# EAGLE board Shiny Stantia (EAGLE 7.6.0)

Size 56.82 x 53.33 mm. Coordinates in mm from the lower left corner, seen from the top.
Outline: 0,0 56.82,0 56.82,53.33 0,53.33 0,0
Copper layers (1*16): Top 0.035mm / dielectric 1.5mm / Bottom 0.035mm
Design rules "default": minimum track width 10mil, minimum drill 24mil, track to track 8mil, track to pad 8mil, pad to pad 8mil, via to via 8mil, smd to smd 8mil, copper to edge 40mil, drill to drill 8mil, minimum pad ring 10mil, minimum via ring 8mil, stop-mask expansion 4mil, vias tented up to drill 0mil, thermal gap 10mil

## Footprints (pad centres in the part's own frame; a part is rotated, then mirrored left to right if it is on the bottom)
DC-POWER = drill 0.889 pad 2.54 octagon: + 0,2.54; - 0,-2.54
LED5MM = drill 0.813 octagon: A -1.27,0; K 1.27,0
DIP04YL = drill 0.813 long: 1 -3.81,-3.81; 2 -1.27,-3.81; 3 1.27,-3.81; 4 3.81,-3.81; 5 3.81,3.81; 6 1.27,3.81; 7 -1.27,3.81; 8 -3.81,3.81
DIL14 = drill 0.813 long: 1 -7.62,-3.81; 2 -5.08,-3.81; 3 -2.54,-3.81; 4 0,-3.81; 5 2.54,-3.81; 6 5.08,-3.81; 7 7.62,-3.81; 8 7.62,3.81; 9 5.08,3.81; 10 2.54,3.81; 11 0,3.81; 12 -2.54,3.81; 13 -5.08,3.81; 14 -7.62,3.81

## Placement (x,y rotation side)
BAT1  [DC-POWER]  5,22.78 0 top
D1  [LED5MM]  5,327.58 0 top  (outside the outline)
D2  [LED5MM]  5,340.28 0 top  (outside the outline)
SW1  [DIP04YL]  5,10.08 0 top
SW3  [DIP04YL]  5,251.38 0 top  (outside the outline)
SW4  [DIP04YL]  5,264.08 0 top  (outside the outline)
U1  [DIL14]  5,35.48 0 top
U2  [DIL14]  5,48.18 0 top
U3  [DIL14]  5,60.88 0 top  (outside the outline)
U4  [DIL14]  5,73.58 0 top  (outside the outline)
U5  [DIL14]  5,86.28 0 top  (outside the outline)
U6  [DIL14]  5,98.98 0 top  (outside the outline)
U7  [DIL14]  5,111.68 0 top  (outside the outline)
U8  [DIL14]  5,124.38 0 top  (outside the outline)
U9  [DIL14]  5,137.08 0 top  (outside the outline)
U10  [DIL14]  5,149.78 0 top  (outside the outline)
U11  [DIL14]  5,162.48 0 top  (outside the outline)
U12  [DIL14]  5,175.18 0 top  (outside the outline)
U13  [DIL14]  5,187.88 0 top  (outside the outline)
U14  [DIL14]  5,200.58 0 top  (outside the outline)
U15  [DIL14]  5,213.28 0 top  (outside the outline)
U16  [DIL14]  5,225.98 0 top  (outside the outline)
U17  [DIL14]  5,238.68 0 top  (outside the outline)
U18  [DIL14]  5,276.78 0 top  (outside the outline)
U19  [DIL14]  5,289.48 0 top  (outside the outline)
U20  [DIL14]  5,302.18 0 top  (outside the outline)
U21  [DIL14]  5,314.88 0 top  (outside the outline)

## Library data of the parts
BAT1 D1 D2 SW1 SW3 SW4 U1-U21 = AUTODESK_CIRCUITS_BREADBOARD

## Nets
N$1: U1.2 U2.3
N$2: U1.8
N$3: U1.6 U2.2
N$4: U1.9
N$5: U1.10
N$6: U1.11
N$7: U3.5
N$8: U3.4
N$9: U3.11
N$10: U3.6
N$11: U3.9
N$12: U3.3
N$13: U1.4 U3.1
N$14: U3.8
N$15: U3.10
N$16: U1.12 U2.13 U3.13
N$17: U4.8
N$18: U4.9
N$19: U4.10
N$20: U4.11
N$21: U4.2 U5.1 U5.9
N$22: U5.13
N$23: U4.6 U6.5 U6.13
N$24: U4.4 U6.4
N$25: U6.6 U7.1
N$26: U6.11 U6.12
N$27: U6.9
N$28: U7.5
N$29: U4.12 U5.5 U5.11 U7.2
N$30: U7.4
N$31: U7.6
N$32: U7.9 U8.6 U9.10
N$33: U7.3
N$34: U7.13
N$35: U8.8
N$36: U8.9
N$37: U8.4
N$38: U8.10
N$39: U8.11
N$40: U9.5
N$41: U8.2 U9.3 U9.11
N$42: U8.12 U9.9
N$43: U9.13
N$44: U10.8
N$45: U10.9
N$46: U10.10
N$47: U10.11
N$48: SW1.4 U1.13 U2.5 U4.13 U6.10 U7.10 U8.13 U9.2 U10.13 U11.5
N$49: SW1.2 U1.3 U2.1 U2.4 U2.10 U4.3 U5.3 U5.10 U6.2 U8.3 U9.1 U9.4 U10.3 U11.4 U11.11
N$50: U10.2 U11.1 U11.3
N$51: SW1.3 U1.5 U2.11 U3.2 U4.5 U5.2 U5.4 U8.5 U10.5 U11.10
N$52: U10.6 U11.13
N$53: U12.5
N$54: U10.4 U11.2 U12.2
N$55: U12.4
N$56: U12.11
N$57: U12.6
N$58: U12.9
N$59: U12.3
N$60: SW1.1 U1.1 U2.9 U4.1 U6.1 U6.3 U7.11 U8.1 U10.1 U12.1
N$61: U12.8
N$62: U12.10
N$63: U10.12 U11.9 U12.13
N$64: U2.12 U13.1
N$65: U2.8 U13.5
N$66: U3.12 U13.12
N$67: U2.6 U13.2
N$68: U13.6 U13.13
N$69: U13.8 U14.1
N$70: U5.6 U13.9
N$71: U14.3 U14.4
N$72: U6.8 U14.5
N$73: U7.12 U14.12
N$74: U5.8 U14.2
N$75: U14.6 U14.13
N$76: U14.8
N$77: U14.9
N$78: U14.10
N$79: U5.12 U13.10
N$80: U15.3 U15.4
N$81: U9.8 U15.5
N$82: U7.8 U15.12
N$83: U9.6 U15.2
N$84: U15.6 U15.13
N$85: U15.8
N$86: U15.9
N$87: U15.10
N$88: U16.1
N$89: U16.3
N$90: U16.5
N$91: U16.11
N$92: U16.12
N$93: U16.4
N$94: U16.13
N$95: U16.2
N$96: U16.6
N$97: U16.8
N$98: U16.9
N$99: U16.10
N$100: U17.3 U17.4
N$101: U11.8 U17.5
N$102: U17.11
N$103: U17.12
N$104: U17.13
N$105: U11.6 U17.2
N$106: U17.6 U17.9
N$107: U12.12 U17.10
N$108: U11.12 U17.1
N$109: SW3.3 U18.12
N$110: SW3.4 U18.9
N$111: SW3.1 U18.2
N$112: SW3.2 U18.5
N$113: SW4.3
N$114: SW4.4
N$115: SW4.5
N$116: SW4.1 U18.1 U18.4 U18.10 U18.13 U21.12
N$117: SW4.2
N$118: SW4.6
N$119: SW4.7
N$120: U18.3 U19.1
N$121: U18.11 U19.13
N$122: U19.6 U20.3
N$123: U18.8 U19.10
N$124: U19.8 U20.13
N$125: U15.11 U19.12
N$126: U17.8 U19.9
N$127: U18.6 U19.4
N$128: U13.11 U19.2
N$129: U14.11 U19.5
N$130: U19.3 U20.1
N$131: U13.3 U13.4
N$132: U9.12 U15.1
N$133: U20.8 U21.13
N$134: U20.12 U21.5
N$135: U20.2 U21.1
N$136: U19.11 U20.5
N$137: U20.6 U21.4
N$138: U20.4 U21.2
N$139: U20.10
N$140: U20.11
N$141: U20.14
N$142: D2.K U21.8
N$143: U21.10
N$144: U21.11
N$145: U21.3
N$146: D1.K U20.9 U21.6
N$147: U21.9
N$148: BAT1.+ SW1.5 SW1.6 SW1.7 SW1.8 SW3.5 SW3.6 SW3.7 SW3.8 SW4.8 U1.14 U2.14 U3.14 U4.14 U5.14 U6.14 U7.14 U8.14 U9.14 U10.14 U11.14 U12.14 U13.14 U14.14 U15.14 U16.14 U17.14 U18.14 U19.14 U21.14
N$149: BAT1.- D1.A D2.A U1.7 U2.7 U3.7 U4.7 U5.7 U6.7 U7.7 U8.7 U9.7 U10.7 U11.7 U12.7 U13.7 U14.7 U15.7 U16.7 U17.7 U18.7 U19.7 U20.7 U21.7

## Tracks (layer width: path | path; a pad name or v marks a point on that pad's centre or on a via)
N$1  (1 unrouted)
N$3  (1 unrouted)
N$13  (1 unrouted)
N$16  (2 unrouted)
N$21  (2 unrouted)
N$23  (2 unrouted)
N$24  (1 unrouted)
N$25  (1 unrouted)
N$26  (1 unrouted)
N$29  (3 unrouted)
N$32  (2 unrouted)
N$41  (2 unrouted)
N$42  (1 unrouted)
N$48  (9 unrouted)
N$49  (14 unrouted)
N$50  (2 unrouted)
N$51  (9 unrouted)
N$52  (1 unrouted)
N$54  (2 unrouted)
N$60  (9 unrouted)
N$63  (2 unrouted)
N$64  (1 unrouted)
N$65  (1 unrouted)
N$66  (1 unrouted)
N$67  (1 unrouted)
N$68  (1 unrouted)
N$69  (1 unrouted)
N$70  (1 unrouted)
N$71  (1 unrouted)
N$72  (1 unrouted)
N$73  (1 unrouted)
N$74  (1 unrouted)
N$75  (1 unrouted)
N$79  (1 unrouted)
N$80  (1 unrouted)
N$81  (1 unrouted)
N$82  (1 unrouted)
N$83  (1 unrouted)
N$84  (1 unrouted)
N$100  (1 unrouted)
N$101  (1 unrouted)
N$105  (1 unrouted)
N$106  (1 unrouted)
N$107  (1 unrouted)
N$108  (1 unrouted)
N$109  (1 unrouted)
N$110  (1 unrouted)
N$111  (1 unrouted)
N$112  (1 unrouted)
N$116  (5 unrouted)
N$120  (1 unrouted)
N$121  (1 unrouted)
N$122  (1 unrouted)
N$123  (1 unrouted)
N$124  (1 unrouted)
N$125  (1 unrouted)
N$126  (1 unrouted)
N$127  (1 unrouted)
N$128  (1 unrouted)
N$129  (1 unrouted)
N$130  (1 unrouted)
N$131  (1 unrouted)
N$132  (1 unrouted)
N$133  (1 unrouted)
N$134  (1 unrouted)
N$135  (1 unrouted)
N$136  (1 unrouted)
N$137  (1 unrouted)
N$138  (1 unrouted)
N$142  (1 unrouted)
N$146  (2 unrouted)
N$148  (29 unrouted)
N$149  (23 unrouted)